# Altium PCB F4_Fc_Board.PcbDoc
Units mil, origin at the board's own origin, x right, y up, seen from the top; angles counter-clockwise.
Board outline 2370 x 1560 mil, 2 copper layers (Top Layer, Bottom Layer); 87 components, 57 nets, 262 pads, 165 vias.
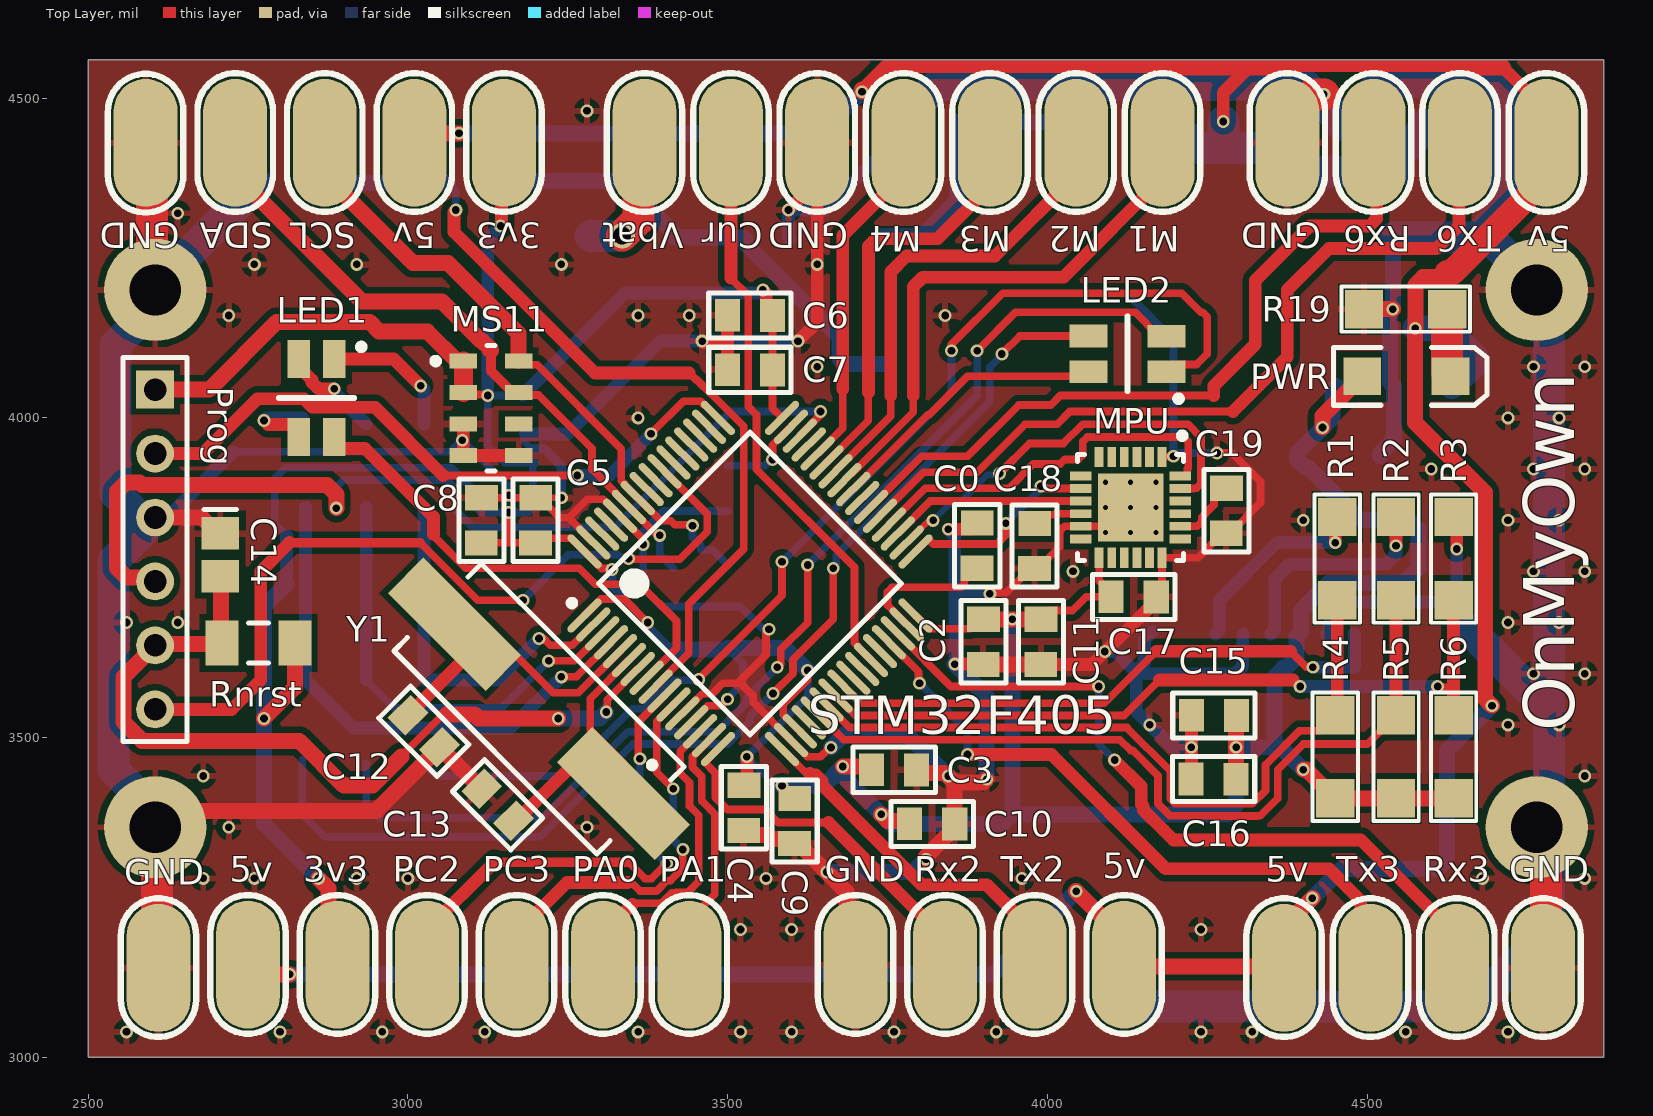
[diagram p0: Top Layer view]
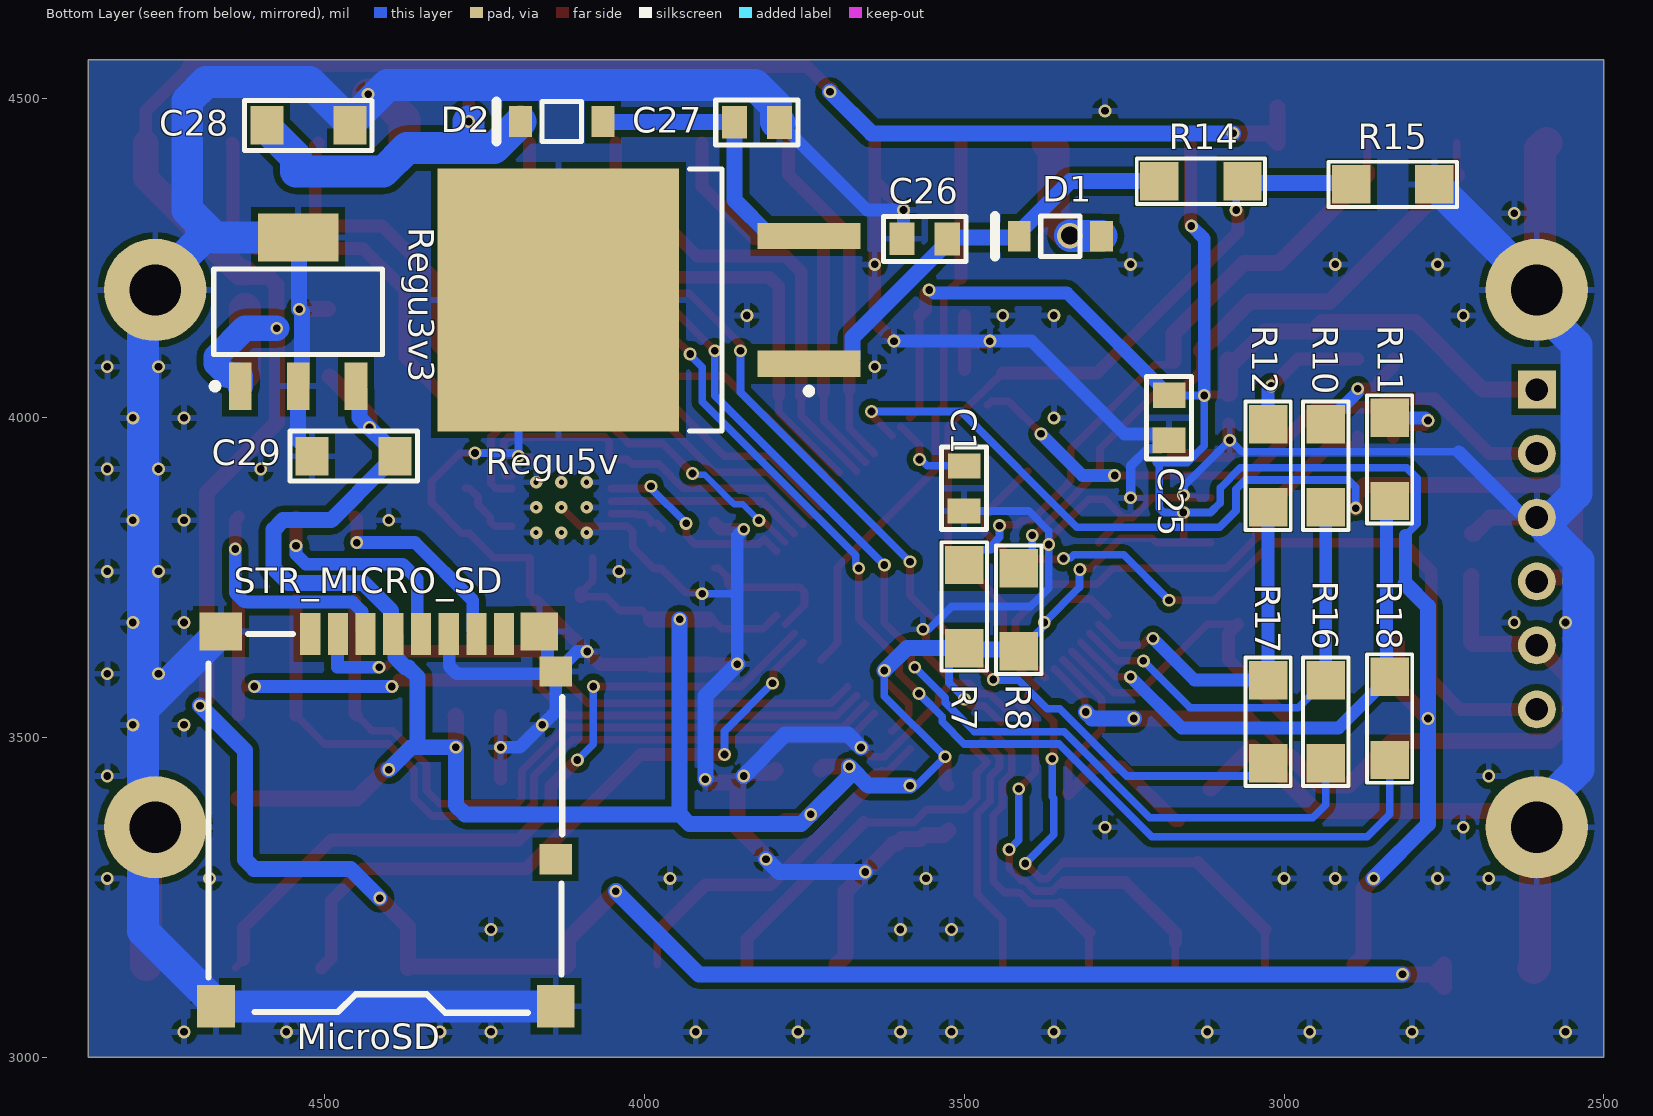
[diagram p1: Bottom Layer view, seen from below]
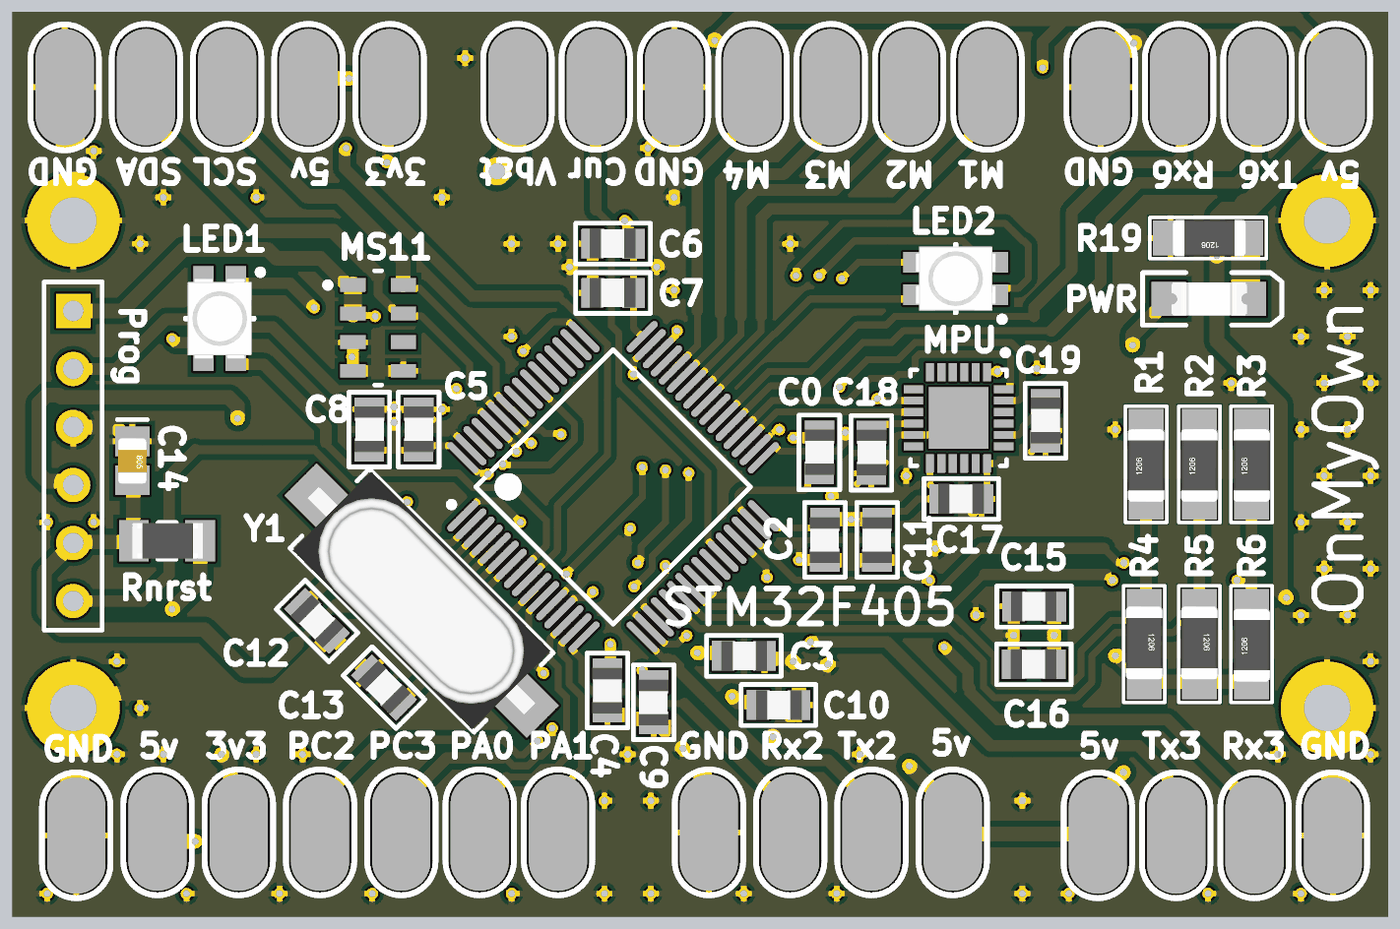
[diagram p2: 3D render of the assembled board from above, using the file's embedded part models]
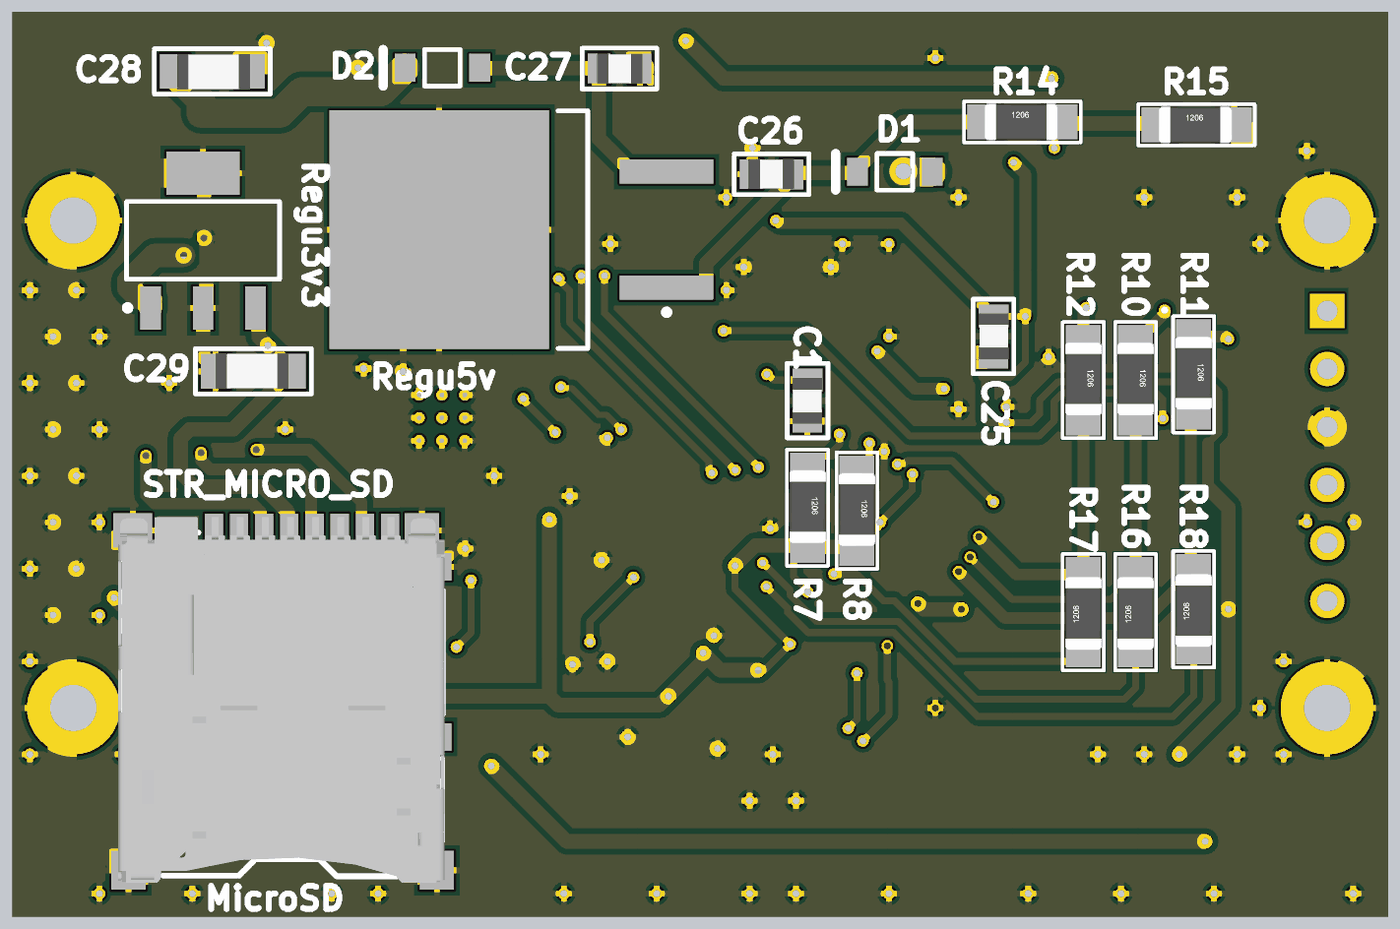
[diagram p3: 3D render of the assembled board from below, using the file's embedded part models]

## Layer stack, top to bottom
Top Solder: solder mask 0.4, Solder Resist, Dk 3.5
Top Layer: signal copper 1.4
Dielectric 1: dielectric 12.6, FR-4, Dk 4.8
Bottom Layer: signal copper 1.4
Bottom Solder: solder mask 0.4, Solder Resist, Dk 3.5

## Board outline
2500,3000 2500,4560 4870,4560 4870,3000

## Design rules (kind name [scope] priority, off if disabled: settings)
Clearance Clearance_1 [InNamedPolygon('GND_TOP') Or InNamedPolygon('GND_BOT')] p1: gap=10 ignorepadtopadclearanceinfootprint=FALSE except(0: Arc-Hole Track-Hole SMDPad-Hole THPad-Hole Via-Hole Fill-Hole Poly-Hole Region-Hole Text-Hole)
Clearance [All] p2: gap=6 ignorepadtopadclearanceinfootprint=FALSE except(0: Arc-Hole Track-Hole SMDPad-Hole THPad-Hole Via-Hole Text-Hole; 5: SMDPad-SMDPad SMDPad-THPad THPad-THPad)
PolygonConnect [All] p1: connectstyle=Relief reliefconductorwidth=10 reliefentries=4 polygonreliefangle="90 Angle" airgapwidth=10
RoomDefinition F4_Flight_Controller_1.01 [InComponentClass('F4_Flight_Controller_1.01')] p1: selectionmemoryflags=1 confinementstyle=ConfineIn formatcopy=TRUE lockcomponents=FALSE outline 0,0 12435,0 12435,225 0,225
RoutingVias [All] p1: holewidth=12 width=20 viastyle="Through Hole" minholewidth=12 minwidth=20 maxholewidth=30 maxwidth=50
SolderMaskExpansion [All] p1: expansion=4 istentingtop=FALSE
Width [All] p1: maxlimit=50 minlimit=5 preferedwidth=8 minimp=50.000000 maximp=50.000000 favimp=50.000000
30 further rules are at their usual default settings.

## Components (designator, comment, footprint, x,y, rotation, side; value= is the part's Value field where it differs from the comment)
3v3 "Pad_CMS" PAD_CMS_5.08x2.54 3150,4430 r90 top
3v3 "Pad_CMS" PAD_CMS_5.08x2.54 2890,3145 r90 top
5v "Pad_CMS" PAD_CMS_5.08x2.54 2750,3145 r90 top
5v "Pad_CMS" PAD_CMS_5.08x2.54 3010,4430 r90 top
5v "Pad_CMS" PAD_CMS_5.08x2.54 4780,4430 r90 top
5v "Pad_CMS" PAD_CMS_5.08x2.54 4120,3145 r90 top
5v "Pad_CMS" PAD_CMS_5.08x2.54 4370,3140 r90 top
C0 "CMS_0805" CONDENSATEUR_CMS_0805 3890,3765 r90 top value=2.2µF
C1 "CMS_0805" CONDENSATEUR_CMS_0805 3500,3925 r270 bottom value=2.2µF
C2 "CMS_0805" CONDENSATEUR_CMS_0805 3900,3685 r270 top value=100nF
C3 "CMS_0805" CONDENSATEUR_CMS_0805 3725,3450 r0 top value=100nF
C4 "CMS_0805" CONDENSATEUR_CMS_0805 3525.39,3425.47 r270 top value=100nF
C5 "CMS_0805" CONDENSATEUR_CMS_0805 3199.61,3804.53 r90 top value=100nF
C6 "CMS_0805" CONDENSATEUR_CMS_0805 3570,4160 r180 top value=100nF
C7 "CMS_0805" CONDENSATEUR_CMS_0805 3570,4075 r180 top value=1nF
C8 "CMS_0805" CONDENSATEUR_CMS_0805 3114.61,3804.53 r90 top value=1nF
C9 "CMS_0805" CONDENSATEUR_CMS_0805 3605,3405 r270 top value=1nF
C10 "CMS_0805" CONDENSATEUR_CMS_0805 3784.53,3365.39 r0 top value=1nF
C11 "CMS_0805" CONDENSATEUR_CMS_0805 3990,3685 r270 top value=1nF
C12 "CMS_0805" CONDENSATEUR_CMS_0805 3000,3535 r315 top value=17pF
C13 "CMS_0805" CONDENSATEUR_CMS_0805 3165,3370 r135 top value=17pF
C14 "100nF" C0805_N 2706.6,3786.04 r270 top
C15 "CMS_0805" CONDENSATEUR_CMS_0805 4295.47,3534.61 r180 top value=10µF
C16 "CMS_0805" CONDENSATEUR_CMS_0805 4295,3435 r180 top value=100nF
C17 "CMS_0805" CONDENSATEUR_CMS_0805 4170,3720 r180 top value=100nF
C18 "CMS_0805" CONDENSATEUR_CMS_0805 3979.61,3764.53 r90 top value=100nF
C19 "CMS_0805" CONDENSATEUR_CMS_0805 4279.61,3819.53 r90 top value=2.2nF
C25 "CMS_0805" CONDENSATEUR_CMS_0805 3180,3965 r90 bottom value=100nF
C26 "CMS_0805" CONDENSATEUR_CMS_0805 3526.78,4279.65 r0 bottom value=330nF
C27 "CMS_0805" CONDENSATEUR_CMS_0805 3859.53,4462.18 r180 bottom value=100nF
C28 "CMS_1206" CONDENSATEUR_CMS_1206 4460.47,4457.25 r0 bottom value=10µF
C29 "CMS_1206" CONDENSATEUR_CMS_1206 4520,3940 r180 bottom value=4.7µF
Cur "Pad_CMS" PAD_CMS_5.08x2.54 3505,4430 r90 top
D1 "MBR0520LT1G" ONSC-SOD-123-2-425-04_V 3349.79,4284.08 r0 bottom
D2 "MBR0520LT1G" ONSC-SOD-123-2-425-04_V 4129.36,4463.36 r0 bottom
GND "Pad_CMS" PAD_CMS_5.08x2.54 2610,3140 r90 top
GND "Pad_CMS" PAD_CMS_5.08x2.54 2590,4430 r270 top
GND "Pad_CMS" PAD_CMS_5.08x2.54 4375,4430 r90 top
GND "Pad_CMS" PAD_CMS_5.08x2.54 3700,3145 r90 top
GND "Pad_CMS" PAD_CMS_5.08x2.54 4775,3140 r90 top
GND "Pad_CMS" PAD_CMS_5.08x2.54 3640,4430 r90 top
LED1 "150141M173100" 3528_A 2857.15,4031.02 r270 top
LED2 "150141M173100" 3528_A 4125,4100 r180 top
M1 "Pad_CMS" PAD_CMS_5.08x2.54 4180,4430 r90 top
M2 "Pad_CMS" PAD_CMS_5.08x2.54 4045,4430 r90 top
M3 "Pad_CMS" PAD_CMS_5.08x2.54 3910,4430 r90 top
M4 "Pad_CMS" PAD_CMS_5.08x2.54 3775,4430 r90 top
MPU "MPU-6000" INSE-QFN-24_V 4130,3860 r270 top
MS11 "MS561101BA03-50" MSI-MS561101BA03-50-8_V 3130,4015 r0 top
PA0 "Pad_CMS" PAD_CMS_5.08x2.54 3305,3145 r90 top
PA1 "Pad_CMS" PAD_CMS_5.08x2.54 3440,3145 r90 top
PC2 "Pad_CMS" PAD_CMS_5.08x2.54 3030,3145 r90 top
PC3 "Pad_CMS" PAD_CMS_5.08x2.54 3170,3145 r90 top
Prog "ProgSWD" HDR1X6 2604.72,4044.23 r270 top
PWR "LED" LED_1206 4561.1,4065 r0 top
R1 "RESISTANCE_CMS_1206" RESISTANCE_CMS_1206 4453.2,3715 r90 top value=22K
R2 "RESISTANCE_CMS_1206" RESISTANCE_CMS_1206 4545,3715 r90 top value=22K
R3 "RESISTANCE_CMS_1206" RESISTANCE_CMS_1206 4635,3715 r90 top value=22K
R4 "RESISTANCE_CMS_1206" RESISTANCE_CMS_1206 4450,3535 r270 top value=47K
R5 "RESISTANCE_CMS_1206" RESISTANCE_CMS_1206 4545,3535 r270 top value=47K
R6 "RESISTANCE_CMS_1206" RESISTANCE_CMS_1206 4635,3405 r90 top value=47K
R7 "RESISTANCE_CMS_1206" RESISTANCE_CMS_1206 3500,3770 r270 bottom value=4.7K
R8 "RESISTANCE_CMS_1206" RESISTANCE_CMS_1206 3415,3765 r270 bottom value=4.7K
R10 "RESISTANCE_CMS_1206" RESISTANCE_CMS_1206 2935,3990 r270 bottom value=150
R11 "RESISTANCE_CMS_1206" RESISTANCE_CMS_1206 2835,4000 r270 bottom value=47
R12 "RESISTANCE_CMS_1206" RESISTANCE_CMS_1206 3025,3990 r270 bottom value=330
R14 "RESISTANCE_CMS_1206" RESISTANCE_CMS_1206 3195,4370 r180 bottom value=10K
R15 "RESISTANCE_CMS_1206" RESISTANCE_CMS_1206 2895,4365 r180 bottom value=2K
R16 "RESISTANCE_CMS_1206" RESISTANCE_CMS_1206 2935,3460 r90 bottom value=150
R17 "RESISTANCE_CMS_1206" RESISTANCE_CMS_1206 3025,3460 r90 bottom value=330
R18 "RESISTANCE_CMS_1206" RESISTANCE_CMS_1206 2835,3465 r90 bottom value=47
R19 "RESISTANCE_CMS_1206" RESISTANCE_CMS_1206 4625,4170 r180 top value=150
Regu3v3 "MCP1826S-3302E/DB" SOT-223-DB3_L 4541.65,4165.7 r90 bottom
Regu5v "L7805ABD2T-TR" TO-263_M 3992.99,4184.34 r0 bottom
Rnrst "100k" R1206_N 2766.39,3647.95 r0 top
Rx2 "Pad_CMS" PAD_CMS_5.08x2.54 3840,3145 r90 top
Rx3 "Pad_CMS" PAD_CMS_5.08x2.54 4640,3140 r90 top
Rx6 "Pad_CMS" PAD_CMS_5.08x2.54 4510,4430 r90 top
SCL "Pad_CMS" PAD_CMS_5.08x2.54 2870,4430 r90 top
SDA "Pad_CMS" PAD_CMS_5.08x2.54 2730,4430 r90 top
STM32F405 "STM32F405RGT6" STM-LQFP64_N 3534.89,3741.1 r45 top
STR_MICRO_SD "MOLEX_MICRO_SD_HEADER_5027740891" MOLEX_MICRO_SD_HEADER_5027740891 4522.76,3662 r0 bottom
Tx2 "Pad_CMS" PAD_CMS_5.08x2.54 3980,3145 r90 top
Tx3 "Pad_CMS" PAD_CMS_5.08x2.54 4505,3140 r90 top
Tx6 "Pad_CMS" PAD_CMS_5.08x2.54 4645,4430 r90 top
Vbat "Pad_CMS" PAD_CMS_5.08x2.54 3370,4430 r90 top
Y1 "8 MHz" HC49/4H_SMX 3205,3545 r135 top

## Footprints (in the part's own frame and the unit in brackets; to place one, negate y for a bottom-side part, rotate by r counter-clockwise, add the part's x,y. Pads: shape width x height; smd on the part's side, far side on the other; paste and mask are expansions set on the pad)
3528_A [mm] "Chip LED, 4-Leads, Body 2.8x3.5mm (max), Pitch 1.42mm, IPC Medium Density"
  rect 1.5x0.9 smd: 1(1.55,0.707) 2(1.55,-0.71) 3(-1.55,0.707) 4(-1.55,-0.707)
  silkscreen extent -2.15,-1.5 0.03,1.9, body extent -1.75,-1.4 1.75,1.4, height 1.87
C0805_N [mm] "Chip Capacitor, Body 2.0x1.3mm, IPC Medium Density"
  rect 1.3x1.5 smd: 1(-0.85,0) 2(0.85,0)
  silkscreen extent -1.8,-0.65 -1.8,0.65, body extent -0.99,-0.63 1.01,0.63, height 0.8
CONDENSATEUR_CMS_0805 [mm] "CONDENSATEUR CMS 0805 ; DIMENSIONS : 2mm x 1.25mm"
  rect 1x1.3 smd: 1(0,0) 2(1.79,-0.01)
  silkscreen extent -0.74,-0.9 2.53,0.89, body extent -0.09,-0.67 1.91,0.64, height 0.73
CONDENSATEUR_CMS_1206 [mil] "CONDENSATEUR CMS 1206 ; DIMENSIONS : 3.2mm x 1.6mm"
  rect 51.18x60 smd: 1(0,0) 2(130,0)
  silkscreen extent -35,-39 165,39, body extent 0,-30 126,31, height 64
HC49/4H_SMX [mm] "Quartz Crystal, SM; Body 13.4 (inc. leads) x 4.9 mm (LxW max)"
  rect 5.5x2 smd: 1(-4.75,0) 2(4.75,0)
  silkscreen extent -5.7,-2.45 5.7,2.45, body extent -6.7,-2.45 6.7,2.45, height 5.08
HDR1X6 [mm]
  rect 1.5x1.5 hole 0.9: 1(0,0)
  round 1.5 hole 0.9: 2(2.54,0) 3(5.08,0) 4(7.62,0) 5(10.16,0) 6(12.7,0)
  silkscreen extent -1.27,-1.27 13.97,1.27
INSE-QFN-24_V [mm] "QFN, 24-Leads, Body 4.00x4.00mm, Pitch 0.50mm, Thermal Pad 2.7x2.6mm"
  rect 0.8x0.35 smd: 1(-2,1.25) 2(-2,0.75) 3(-2,0.25) 4(-2,-0.25) 5(-2,-0.75) 6(-2,-1.25) 13(2,-1.25) 14(2,-0.75) 15(2,-0.25) 16(2,0.25) 17(2,0.75) 18(2,1.25)
  rect 0.35x0.85 smd: 7(-1.25,-1.975) 8(-0.75,-1.975) 9(-0.25,-1.975) 10(0.25,-1.975) 11(0.75,-1.975) 12(1.25,-1.975) 19(1.25,1.975) 20(0.75,1.975) 21(0.25,1.975) 22(-0.25,1.975) 23(-0.75,1.975) 24(-1.25,1.975)
  rect 2.7x2.6 smd: 25(0,0)
  silkscreen extent -2.97,-2.1 2.1,2.18, body extent -2,-2 2,2, height 0.95
LED_1206 [mm] "SM LED; 2 Flat Leads"
  rect 1.5x1.5 smd: 1(-1.75,0) 2(1.75,0)
  silkscreen extent -2.9,-1.15 3.2,1.15, body extent -1.62,-0.72 1.68,0.73, height 1.36
MOLEX_MICRO_SD_HEADER_5027740891 [mm]
  rect 1.5x1.7 smd: 0(-9.754,14.783) 0(3.74,14.783)
  rect 1.5x1.5 smd: 0(-9.1,-0.1)
  rect 1.7x1.5 smd: 0(3.55,-0.1)
  rect 0.8x1.68 smd: 1(0,0) 2(-1.1,0) 3(-2.2,0) 4(-3.3,0) 5(-4.4,0) 6(-5.5,0) 7(-6.6,0) 8(-7.7,0)
  rect 1.3x1.2 smd: 9(-9.75,1.49) 10(-9.75,8.94)
  round 1.524 on Bottom Overlay: ""(0.432,1.93)
  silkscreen extent -10.01,0 4.04,15.04, body extent -10.1,-0.68 4.2,15.32, height 1.88
MSI-MS561101BA03-50-8_V [mm] "SMD, 8-Leads, Body 5x3mm, Pitch 1.25mm"
  rect 1.1x0.6 smd: 1(-1.1,1.875) 2(-1.1,0.625) 3(-1.1,-0.625) 4(-1.1,-1.875) 5(1.1,-1.875) 6(1.1,-0.625) 7(1.1,0.625) 8(1.1,1.875)
  silkscreen extent -2.32,-2.5 0.15,2.5, body extent -1.5,-2.5 1.5,2.5, height 1
ONSC-SOD-123-2-425-04_V [mm] "SOD, 2-Leads, Body 2.69x1.6mm"
  rect 0.91x1.22 smd: 1(-1.635,0) 2(1.635,0)
  silkscreen extent -0.78,-0.8 2.59,0.8, body extent -1.35,-0.8 1.35,0.8, height 1.35
PAD_CMS_5.08x2.54 [mil] "Pad pour souder un fil"
  oval 200x100 smd paste+0.2: 1(0,0)
  silkscreen extent -108,-59 109,59, body extent -85,-30 84,30, height 10
R1206_N [mm] "Chip Resistor, Body 3.2x1.6mm, IPC Medium Density"
  rect 1.3x1.8 smd: 1(-1.45,0) 2(1.45,0)
  silkscreen extent -0.4,-0.8 0.4,0.8, body extent -1.68,-0.87 1.68,0.87, height 0.71
RESISTANCE_CMS_1206 [mil] "RESISTANCE CMS 1206 ; DIMENSIONS : 3.2mm x 1.6mm"
  rect 60x60 smd: 1(0,0) 2(130,0)
  silkscreen extent -35,-35 165,35, body extent 0,-31 126,31, height 39
SOT-223-DB3_L [mm] "SOT223, 4-Leads, Body 6.5x3.5mm, Pitch 2.3mm, Lead Span 7mm, IPC High Density"
  rect 1.9x0.9 smd: 1(-2.95,2.3) 2(-2.95,0) 3(-2.95,-2.3)
  rect 1.9x3.2 smd: 4(2.95,0)
  silkscreen extent -3.07,-3.35 1.7,3.43, body extent -1.85,-3.35 1.85,3.35, height 1.8
STM-LQFP64_N [mm] "Thin QFP, 64-Leads, Body 10x10mm, Pitch 0.5mm, IPC Medium Density"
  oval 1.8x0.3 smd: 1(-5.55,3.75) 2(-5.55,3.25) 3(-5.55,2.75) 4(-5.55,2.25) 5(-5.55,1.75) 6(-5.55,1.25) 7(-5.55,0.75) 8(-5.55,0.25) 9(-5.55,-0.25) 10(-5.55,-0.75) 11(-5.55,-1.25) 12(-5.55,-1.75) 13(-5.55,-2.25) 14(-5.55,-2.75) 15(-5.55,-3.25) 16(-5.55,-3.75) 33(5.55,-3.75) 34(5.55,-3.25) 35(5.55,-2.75) 36(5.55,-2.25) 37(5.55,-1.75) 38(5.55,-1.25) 39(5.55,-0.75) 40(5.55,-0.25) 41(5.55,0.25) 42(5.55,0.75) 43(5.55,1.25) 44(5.55,1.75) 45(5.55,2.25) 46(5.55,2.75) 47(5.55,3.25) 48(5.55,3.75)
  oval 0.3x1.8 smd: 17(-3.75,-5.55) 18(-3.25,-5.55) 19(-2.75,-5.55) 20(-2.25,-5.55) 21(-1.75,-5.55) 22(-1.25,-5.55) 23(-0.75,-5.55) 24(-0.25,-5.55) 25(0.25,-5.55) 26(0.75,-5.55) 27(1.25,-5.55) 28(1.75,-5.55) 29(2.25,-5.55) 30(2.75,-5.55) 31(3.25,-5.55) 32(3.75,-5.55) 49(3.75,5.55) 50(3.25,5.55) 51(2.75,5.55) 52(2.25,5.55) 53(1.75,5.55) 54(1.25,5.55) 55(0.75,5.55) 56(0.25,5.55) 57(-0.25,5.55) 58(-0.75,5.55) 59(-1.25,5.55) 60(-1.75,5.55) 61(-2.25,5.55) 62(-2.75,5.55) 63(-3.25,5.55) 64(-3.75,5.55)
  silkscreen extent -5.67,-4.25 4.25,4.57, body extent -5,-5 5,5, height 1.6
TO-263_M [mm] "D2-PAK, 4-Leads, Body 9.2x10.2mm, Pitch 2.54mm, Lead Span 15.4mm, IPC Low Density"
  rect 4.1x1.05 smd: 1(-6.35,2.54) 3(-6.35,-2.54)
  rect 9.6x10.45 smd: 4(3.6,0)
  silkscreen extent -6.47,-5.2 -1.6,5.2, body extent -2.9,-5.2 6.45,5.2, height 4.6

## Part data
3v3 3v3 5v 5v 5v 5v 5v Cur GND GND GND GND GND GND M1 M2 M3 M4 PA0 PA1 PC2 PC3 Rx2 Rx3 Rx6 SCL SDA Tx2 Tx3 Tx6 Vbat: "Pad pour souder un fil", LatestRevisionNote="Mech Layer 1 removed.", PackageReference=PAD_CMS, Publisher="Damien Guitton"
C0 C1 C2 C3 C4 C5 C6 C7 C8 C9 C10 C11 C12 C13 C15 C16 C17 C18 C19 C25 C26 C27: library part CONDENSATEUR_CMS_CER_0805, "CONDENSATEUR CMS CERAMIQUE 0805", Type=CMS_0805
C14: library part Condensateur, "Capacitor", LatestRevisionDate=17-Jul-2002, LatestRevisionNote="Re-released for DXP Platform.", PackageReference=RAD-0.3, Published=8-Jun-2000, Publisher="Altium Limited"
C28 C29: library part CONDENSATEUR_CMS_CER_1206, "CONDENSATEUR CMS CERAMIQUE 1206", Type=CMS_1206
D1 D2: library part CMP-004-00003-1, "Schottky Power Rectifier, 20 V, 5.5 A, -65 to 125 degC, 2-Pin SMD, RoHS, Tape and Reel", Case/Package=SOD, Forward Current=5dA, Forward Voltage=3.85dV, Manufacturer="ON Semiconductor", Max Operating Temperature=125°C, Max Surge Current=5.5A, Min Operating Temperature=-65°C, Package Description="2-Pin Surface Mount Device, Body 2.69 x 1.6 mm", Package Quantity=3000, Package Reference=SOD-123-2-425-04, Peak Reverse Current=250uA, Datasheet URL=http://www.onsemi.cn/pub_link/Collateral/MBR0520LT1-D.PDF, Datasheet Version="Rev. 6, 01/2012", Elements=1, Manufacturer URL=http://www.onsemi.com/, Mounting Technology=SM, Packaging=TapeandReel, Pins=2, RoHS Compliant=True
LED1 LED2: library part CMP-1431-00001-1, "SMD Full-Color Top LED, WL-SFTW, Red & Green & Blue", Color="Red & Green & Blue", Manufacturer="Wuerth Elektronik", ComponentLink1Description="Manufacturer URL", ComponentLink1URL=http://www.we-online.com, ComponentLink2Description=Datasheet, ComponentLink2URL=http://katalog.we-online.com/led/datasheet/150141M173100.pdf, PackageReference=3528_A, PartNumber=150141M173100
MPU: library part CMP-2000-05008-1, "3-Axis Gyroscope 3-Axis Accelerometer Motion Processing Unit with I2C and SPI, 2.5, 3 or 3.3 V, -40 to 85 degC, 24-Pin QFN, RoHS, Tape and Reel", Manufacturer=InvenSense, Operating Temperature=-40degC~85degC(TA), Package Description="24-Pin Quad Flat No-lead Package, Body 4 x 4 mm, Pitch 0.5 mm", Package Reference=QFN-24, Standard Package=5,000, Category=Sensors,Transducers, Datasheet URL=https://www.invensense.com/wp-content/uploads/2015/02/MPU-6000-Datasheet1.pdf, Datasheet Version="Rev. 3.4, 08/2013", Family=Multifunction, Featured Product=MPU60006AxisIntegratedSPISolution, Manufacturer URL=http://www.invensense.com/, Online Catalog=MPU-6000™Series, Other Names="1428-1005-2 / MPU6000", Output Type=I²C,SPI, Sensor Type=Accelerometer,Gyroscope,3Axis
MS11: library part CMP-2000-05251-1, "Barometric Pressure Sensor, with Stainless Steel Cap, 1.8 to 3.6 V, -45 to 85 degC, 8-Pin QFN, RoHS, Tape and Reel", Manufacturer="Measurement Specialties", Operating Pressure Max=1200mbar, Operating Pressure Min=10mbar, Operating Temperature Max=85degC, Operating Temperature Min=-40degC, Package Description="8-Pin Surface Mount Device, Body 5 x 3 mm, Pitch 1.25 mm", Package Reference=MS561101BA03-50-8, Sensor Case Style=QFN, Supply Current=12.5µA, Supply Voltage Max=3.6V, Supply Voltage Min=1.8V, Connection Size=0.5mm, Datasheet URL=http://www.te.com/commerce/DocumentDelivery/DDEController?Action=srchrtrv&DocNm=MS5611-01BA03&DocType=Data+Sheet&DocLang=English&DocFormat=pdf&PartCntxt=CAT-BLPS0036, Datasheet Version=Sep-15, Manufacturer URL=http://www.meas-spec.com/, No. of Pins=8, Pressure Type=Barometric, SVHC=NoSVHC(20-Jun-2013)
Prog: library part "Header 6", "Header, 6-Pin", LatestRevisionDate=17-Jul-2002, LatestRevisionNote="Re-released for DXP Platform.", Publisher="Altium Limited"
PWR: "Typical LED", LatestRevisionDate=08-Jul-2005, LatestRevisionNote="Mech Layer 1 removed.", PackageReference=LED-1, Published=8-Jun-2000, Publisher="Altium Limited"
R1 R2 R3 R4 R5 R6 R7 R8 R10 R11 R12 R14 R15 R16 R17 R18 R19: "RESISTANCE CMS 1206", Type=CMS_1206
Regu3v3: library part CMP-0136-00504-1, "1000 mA, Low Voltage, Low Quiescent Current LDO Regulator, 3-Pin SOT-223, Extended Temperature", DatasheetVersion="revA, Aug-2007", PackageDescription="3-Lead Plastic Small Outline Transistor (DB) [SOT-223]", PackageReference=SOT-223-DB3, PackageVersion="revBB, Aug-2009"
Regu5v: library part CMP-0244-00199-1, "Positive Voltage Regulator, 3-Pin D2PAK, Tape and Reel", ComponentLink1Description="Manufacturer URL", ComponentLink1URL=http://www.st.com, ComponentLink2Description=Datasheet, ComponentLink2URL=http://www.st.com/internet/com/TECHNICAL_RESOURCES/TECHNICAL_LITERATURE/DATASHEET/CD00000444.pdf, DatasheetVersion=16/11/2011, PackageDescription="3-Pin Transistor Outline Package 2.54 mm Pitch, 15.4 mm Lead Span (D2PAK)", PackageReference=TO-263, PackageVersion=2011
Rnrst: library part Resistor, "Resistor", LatestRevisionDate=17-Jul-2002, LatestRevisionNote="Re-released for DXP Platform.", PackageReference=AXIAL-0.5, Published=8-Jun-2000, Publisher="Altium Limited"
STM32F405: "ARM Cortex-M4 32-bit MCU+FPU, 210 DMIPS, 1024 kB Flash, 192 kB Internal RAM, 51 I/Os, 64-pin LQFP, -40 to 85 degC, Tray", I/Os (High Current)=51, Manufacturer=STMicroelectronics, Operating Frequency(F) (Processor speed) (MHz)=168, Supplier Part Number 1=497-11767-ND, Supply Voltage(Vcc) max (V)=3.6, Supply Voltage(Vcc) min (V)=1.8, ComponentLink1Description="Manufacturer URL", ComponentLink1URL=http://www.st.com/web/en/home.html, ComponentLink2Description=Datasheet, ComponentLink2URL=http://www.st.com/st-web-ui/static/active/en/resource/technical/document/datasheet/DM00037051.pdf, ComponentLink3Description="Package Specification", ComponentLink3URL=http://www.st.com/st-web-ui/static/active/en/resource/technical/document/datasheet/DM00037051.pdf, Core="ARM Cortex-M4", D/A Converter=2x12-bit, DatasheetVersion="Rev. 4", FLASH Size (Prog) (kB)=1024, Internal RAM Size (kB)=192, Mounting Technology="Surface Mount", PackageDescription="64-Pin Low Profile Quad Flat Package, 10 x 10 mm Body, 0.5 mm Pitch", PackageReference=LQFP64, PackageVersion="Rev. 4, 06/2013", Packing=Tray, PartNumber=STM32F405RGT6, Supplier 1=Digi-Key, Supplier 2=Farnell, Supplier 3=Newark, Supplier 4=Mouser, Supplier Part Number 2=2064363, Supplier Part Number 3=73T2329, Supplier Part Number 4=511-STM32F405RGT6
Y1: library part Quartz, "Crystal Oscillator", LatestRevisionDate=17-Jul-2002, LatestRevisionNote="Re-released for DXP Platform.", PackageReference=R38, Published=8-Jun-2000, Publisher="Altium Limited"

## Free pads (board coordinates)
  round 160 hole 80: 2(4765,4200) 3(4765,3360) 4(2605,4200) 5(2605,3360)

## Via types
v1: diameter 20, hole 12, Top Layer to Bottom Layer, 155 vias
v2: diameter 19.68, hole 7.87, Top Layer to Bottom Layer, 9 vias
v3: diameter 40, hole 28, Top Layer to Bottom Layer, 1 vias

## Nets (pads, with @x,y where several pads share a name; then routed paths per layer and width w, separated by ;. In a path a pad name is that pad's centre, name@x,y a point inside that pad or via, vN(x,y) a via of type N, cw(c..) or ccw(c..) an arc to the next point about the centre after c; other vN are vias at no path point)
3V3: 3v3.1 C2.1 C3.1 C4.1 C5.1 C6.1 C7.1 C8.1 C9.1 C10.1 C11.1 C15.1 C16.1 C17.2 C25.2 C29.2 MPU.13 MS11.1 MS11.2 Prog.1 PWR.1 R4.2 R5.2 R6.1 R7.2 R8.2 Regu3v3.3 Rnrst.2 STM32F405.1 STM32F405.13 STM32F405.19 STM32F405.32 STM32F405.48 STM32F405.64 STR_MICRO_SD.4 | length 7938.1
  Top Layer w12: MS11.1@3076.85,4088.82 MS11.1 ; MS11.2 3089.77,4036.53 3123.47,4036.53 v1(3125,4035) ; C8.1 3157.11,3804.53 ; v1(3145,4300) v1@3146.53,4301.53 ; 3v3.1@3146.53,4426.53 3v3.1@3150,4430 ; v1(3157.5,3852) 3157.11,3851.61 3157.11,3804.53 ; STM32F405.1 3276.12,3690.99 3301.99,3716.85 3338.15,3716.85 v1(3375,3680) ; v1(3319.34,3763) 3317.81,3764.53 3302.8,3764.53 3276.12,3791.21 STM32F405.64 3255.24,3811.95 3207.03,3811.95 C5.1 3157.11,3804.53 ; STM32F405.13 3443.16,3523.96 3469.02,3549.82 3489.82,3549.82 v1(3499.91,3559.91) ; C6.1 C7.1 3570,4015 STM32F405.48 ; STM32F405.19@3612.97,3510.04 STM32F405.19 3612.84,3510.17 3586.97,3536.04 3586.97,3552.67 3625,3590.69 v1(3625,3605) ; STM32F405.32 3814.54,3670.24 3879.34,3670.24 3894.09,3685 C2.1 ; C11.1 4003.69,3698.69 4038.69,3698.69 4060.39,3720.39 C17.2 ; MPU.13 4080.79,3745.04 C17.2@4099.53,3726.3
  Top Layer w20: v1@3146.53,4301.53 3v3.1@3146.53,4426.53 ; C4.1 3530,3430.08 v1(3530,3470) ; v1(3555,4200) 3560.31,4194.69 3560.31,4169.69 C6.1 ; C17.2 C17.2@4099.53,3726.3
  Top Layer w25: Prog.1 2689.23,4044.23 2795,4150 2940,4150 2955,4135 3030.67,4135 MS11.1@3076.85,4088.82 ; v1(2775,3530) 2823.48,3578.48 Rnrst.2 ; v1(2860,3280) 2875.65,3264.35 2875.65,3159.35 3v3.1@2890,3145 ; v1(3680,3455) 3720,3455 C3.1 ; v1(3740,3380) 3750,3370 3779.92,3370 C10.1 ; C2.1 v1(3945,3685) C11.1 ; C16.1 v1(4295,3485) 4295,3534.13 C15.1 ; v1(4400,3450) 4405,3450 R4.2 R5.2 R6.1 ; v1(4430,3985) 4430,4002.8 PWR.1
  Top Layer w30: MS11.2 MS11.1
  Bottom Layer w10: v1@3547.77,4195.47 3552.29,4200 v1(3555,4200)
  Bottom Layer w12: 2810,3816.62 2792,3834.62 2792,3905.38 2808.62,3922 3068.25,3922 3100,3890.25 3100,3867.03 3115.03,3852 v1(3157.5,3852) 3187.97,3852 3195,3859.03 3195,3925 3200,3930 3151.34,3930 3125,3956.34 v1(3125,4035) 3179.13,4035 C25.2 ; v1(3319.34,3763) 3320,3762.34 3320,3735 v1(3375,3680) 3376.53,3678.47 3376.53,3673.47 R8.2 ; v1(3499.91,3559.91) 3499.91,3561.91 3524,3586 3524,3616 R7.2 ; v1(3585,3425) 3575,3425 v1(3530,3470) 3625,3565 v1(3625,3605)
  Bottom Layer w20: 2810,3740 2810,3816.62 ; v1(3125,4035) 3125,4280 v1(3145,4300) ; C25.2 3339.61,4195.47 v1@3547.77,4195.47
  Bottom Layer w25: 2810,3740 2775,3705 v1(2775,3530) 2775,3365 v1(2860,3280) ; R8.2 3417.5,3637.5 3497.5,3637.5 R7.2 3590,3640 v1(3625,3605) ; v1(3585,3425) 3650,3425 v1(3680,3455) 3680,3440 v1(3740,3380) 3755,3365 3930,3365 3945,3380 ; v1(3945,3685) 3945,3380 ; v1(4400,3450) 4365,3485 4350,3485 ; Regu3v3.3 4445.88,4044.34 4445.88,4000.29 4390,3944.41 C29.2 4390,3935.59 4403.09,3922.5 4407.5,3922.5 4490,3840 4565.36,3840 4580,3825.36 4580,3765 4556.57,3741.57 4439.32,3741.57 4396.08,3698.34 4396.08,3665.25 4389.59,3658.75 4389.59,3626.31 4384.78,3621.49 4384.78,3620.85 4373.35,3609.43 4369.43,3609.43 4355,3595 4355,3490 4350,3485 ; 3945,3380 4280.36,3380 4295,3394.64 v1(4295,3485) 4350,3485
5Vin: C27.1 D2.1 Regu5v.3 | length 467.2
  Bottom Layer w25: Regu5v.3 3803.03,4284.34 3859.53,4340.84 C27.1 3860.12,4462.77 4064.4,4462.77 D2.1
+5: 5v.1 C28.2 D2.2 Regu3v3.1 | length 6232.2
  Top Layer w20: v1@3710,4513.29 3746.21,4549.5 4208.79,4549.5 4210.36,4547.93 ; v1(4275,4463.36) 4275,4508.28 4314.65,4547.93 ; 4347.14,4550.43 4672.86,4550.43 ; 4712.07,4547.93 4780,4480 5v.1@4780,4430
  Top Layer w25: 5v.1@2764.35,3130.65 2750,3145 2750,3110 2770,3130 v1(2815,3130) ; 5v.1@3010,4485 3010,4430 3025,4445 v1(3080,4445) ; v1(3710,4510) v1@3710,4513.29 ; v1(4045,3260) 4120,3185 4120,3145 4122.5,3142.5 4367.5,3142.5 4370,3140 4370,3205 v1(4414.14,3249.14) ; 4210.36,4547.93 4314.65,4547.93 4344.64,4547.93 ; 4625,4227 4618,4220 4587.42,4220 4575.5,4208.08 4575.5,4140.5 v1(4575,4140) 4575,3992.58 4684.5,3883.08 4684.5,3560.5 v1(4695,3550) ; 4675.36,4547.93 4712.07,4547.93
  Top Layer w40: 4625,4227 4632,4227 4780,4375 5v.1@4780,4430
  Bottom Layer w25: v1(2815,3130) 3915,3130 v1(4045,3260) ; v1(3080,4445) 3645,4445 v1(3710,4510) ; v1(4414.14,3249.14) 4460,3295 4610.36,3295 4625,3309.64 4625,3480 v1(4695,3550)
  Bottom Layer w40: v1(4575,4140) 4625.16,4140 4669.92,4095.25 4669.92,4084.92 4651.96,4066.96 4634.48,4066.96 4632.2,4064.68 Regu3v3.1
  Bottom Layer w50: D2.2 4235.04,4422.05 4275,4422.05 ; v1(4275,4463.36) 4275,4422.05 ; C28.2 4590.47,4452.84 4545,4407.37 4545,4385 4408.55,4385 4371.5,4422.05 4275,4422.05
ADC1_IN9: Cur.1 STM32F405.27 | length 899.4
  Top Layer w12: 3505,4218.58 3532.21,4191.37 3532.21,4017.79 3545,4005 3545,3920 3698.33,3766.67 3698.33,3648.36 3703.45,3643.24 3703.45,3642.14 STM32F405.27
  Top Layer w20: 3505,4218.58 Cur.1
ADC_IN11: R14.2 R15.1 STM32F405.9 | length 1294.8
  Top Layer w12: STM32F405.9 3408.09,3600.38 3408.09,3601.35 3439,3632.26 3439,3709 3525,3795 3525,3986.65 3474.85,4036.8 3474.46,4036.8 3451.26,4060 3450,4060 3440,4070
  Top Layer w20: v1(3075,4325) 3072.05,4322.05 3072.05,4290.5 3292.55,4070 3440,4070
  Bottom Layer w12: R14.2@3062.5,4367.5 3075,4355 v1(3075,4325)
  Bottom Layer w25: R15.1 2897.5,4367.5 R14.2@3062.5,4367.5
BLUE: R11.2 R18.2 STM32F405.4 | length 838.6
  Top Layer w12: v1(3240,3595) 3263.52,3595 STM32F405.4
  Bottom Layer w20: R11.2@2840,3860 2840,3600 R18.2 2915,3515 3160,3515 v1(3240,3595)
GND: C0.2 C1.2 C2.2 C3.2 C4.2 C5.2 C6.2 C7.2 C8.2 C9.2 C10.2 C11.2 C12.2 C13.2 C14.1 C15.2 C16.2 C17.1 C18.1 C19.1 C25.1 C26.2 C27.2 C28.1 C29.1 GND.1 MPU.1 MPU.11 MPU.18 MPU.25 MS11.3 MS11.4 MS11.5 pad.2 pad.3 pad.4 pad.5 Prog.3 R15.2 R19.2 Regu3v3.2 Regu3v3.4 Regu5v.4 STM32F405.12 STM32F405.18 STM32F405.60 STM32F405.63 STR_MICRO_SD.0 STR_MICRO_SD.6 STR_MICRO_SD.9 | length 13454.3
  Top Layer w10: C5.2 3205.91,3875 v1(3240,3875)
  Top Layer w12: C8.2 C5.2 ; C5.2@3205.91,3875 3237.28,3843.63 3251.41,3843.63 ; STM32F405.63 3251.41,3843.63 ; v1(3368,3802) 3368,3810.42 3305.67,3872.75 3280.53,3872.75 3251.41,3843.63 ; STM32F405.12 3429.24,3537.88 3459.27,3567.91 3460.24,3567.91 3461.15,3568.82 3476.29,3568.82 3492.47,3585 3520,3585 ; v1(3564.5,3669.5) 3560,3665 3560,3630 3520,3590 3520,3585 ; v1(3661.53,3484.5) 3659.36,3484.5 3645.11,3470.25 3624.92,3470.25 3599.05,3496.12 STM32F405.18 3540,3555.04 3540,3565 3520,3585 ; v1(3910,3725) 3911.53,3726.53 3935.7,3726.53 3973.7,3764.53 C18.1 3985.51,3764.53 4018.59,3797.61 4018.59,3822.03 4027.03,3830.47 MPU.11 4100.47,3830.47 v2(4130,3860) ; C17.1@4170,3714.09 4179.21,3723.31 MPU.18 ; MPU.1 4179.84,3939.37 4196.37,3939.37 v1(4197,3940) ; MPU.18@4179.42,3781.26 4235.43,3781.26 4273.7,3819.53 C19.1 4285.51,3819.53 4333.02,3867.04 4333.02,3900.64 4288.66,3945 v1(4265,3945)
  Top Layer w20: MS11.3 MS11.4 MS11.5 ; v1(3460,4120) 3462.11,4117.89 3499.53,4117.89 ; C7.2 3499.53,4117.89 ; C6.2 3499.53,4117.89 ; v1(3595,4325) GND.1@3640,4370 ; v1(3610,4120) 3640,4150 GND.1@3640,4370 ; GND.1@3640,4430 GND.1@3640,4370 ; v1(3845,3825.79) 3880.71,3825.79 C0.2 ; v1(3855,3615) 3899.13,3615 C2.2 ; C11.2 4069.53,3614.53 v1(4089.76,3634.76) 4110,3655 4110.91,3655 C17.1@4170,3714.09 ; C16.2 4225,3435.87 v1(4225,3485) C15.2
  Top Layer w25: Prog.3 2677.94,3844.23 2702.66,3819.5 C14.1 ; pad.5@2605,3385 2949.66,3385 C12.2 3050.11,3484.89 3114.89,3420.11 C13.2 ; C4.2 3532.19,3347.81 3562.46,3347.81 3568.56,3341.71 3597.42,3341.71 C9.2 3610.51,3334.53 3685.65,3259.39 3685.65,3159.35 GND.1@3700,3145 ; C3.2 3800.08,3445 3840,3445 v1(3845,3440) 3855,3430 ; v1(3810,3310) 3810,3314.09 3855,3359.09 C10.2 3855,3430 ; C2.2 C11.2 ; v1(3905,3435) 3900,3430 3855,3430 ; R19.2 v1(4540,4170) ; GND.1@4775,3140 GND.1@4779.52,3144.52 ; pad.3@4779.52,3368.85 pad.3@4784.05,3373.37
  Top Layer w50: GND.1@2590,4430 2599.57,4420.43 2599.57,4210.43 pad.4 ; pad.5@2605,3385 2607.5,3382.5 2607.5,3142.5 GND.1@2610,3140 ; GND.1@4375,4430 4375,4466.47 4414.46,4505.93 v1(4432.21,4505.93) ; GND.1@4779.52,3144.52 pad.3@4779.52,3368.85
  Bottom Layer w10: C25.1 C25.1@3193.24,3951.76
  Bottom Layer w12: 2727,3947 3066.04,3947 v1@3084.04,3965 ; v1(3085,3965) 3155.97,3894.03 3155.97,3880.53 v1(3157.5,3879) ; C1.2 3399.53,3854.53 3368,3823 v1(3368,3802) 3368,3733.62 3396.62,3705 3520,3705 3555.5,3669.5 v1(3564.5,3669.5) ; 3855,3715.39 3864.61,3725 v1(3910,3725) ; Regu5v.4 4197,4122.06 v1(4197,3940) 4199.16,3940 4204.16,3945 v1(4265,3945)
  Bottom Layer w15: C25.1@3193.24,3951.76 3213.25,3951.76 3240,3925 v1(3240,3875)
  Bottom Layer w20: Prog.3 2612.19,3851.7 2631.7,3851.7 2727,3947 ; v1@3084.04,3965 v1(3085,3965) ; C25.1@3183.65,3974.69 3249.69,3974.69 3395,4120 v1(3460,4120) v1(3610,4120) ; C26.2 3595,4282.29 v1(3595,4325) 3652.27,4325 C27.2@3773.47,4446.19 ; v1(3845,3825.79) 3855,3815.79 3855,3715.39 v1(3855,3615) ; v1(4089.76,3634.76) 4105.5,3634.76 4136.93,3603.34 4138.07,3603.34 4151.69,3616.96 4151.69,3653.14 STR_MICRO_SD.0@4164.49,3665.94 ; v1(4225,3485) 4195,3485 4138.9,3541.1 STR_MICRO_SD.9 4142.24,3600 4293.54,3600 4305.26,3611.72 4305.26,3661.04 STR_MICRO_SD.6
  Bottom Layer w25: v1(3655,3290) 3790,3290 v1(3810,3310) ; v1(3661.53,3484.5) 3682.03,3505 3780,3505 v1(3845,3440) ; v1(3855,3615) 3905,3565 v1(3905,3435) ; C29.1 4520,3944.41 4541.65,3966.06 Regu3v3.2 4535.5,4055.71 4535.5,4165.5 v1(4540,4170) 4540,4280.19 Regu3v3.4 ; STR_MICRO_SD.0@4670,3080 STR_MICRO_SD.0@4670,3083.94
  Bottom Layer w50: pad.5@2605,3385 2540,3450 2540,3777.06 2604.72,3841.78 Prog.3 2602.98,3845.96 2579.04,3845.96 2543.19,3881.81 2543.19,4114.25 2610,4181.06 pad.4 2610,4210 R15.2 ; C27.2 3793.78,4461.78 3794.37,4462.37 3794.37,4487.55 3827.18,4520.36 4401.77,4520.36 4459.88,4462.25 4459.88,4457.84 C28.1 4460.47,4461.66 4523.81,4525 4685.71,4525 4715,4495.71 4715,4325 4693.42,4303.42 ; STR_MICRO_SD.0@4138.76,3080 STR_MICRO_SD.0@4670,3080 ; Regu3v3.4 4671.84,4281.84 4693.42,4303.42 ; STR_MICRO_SD.0@4662.52,3665.94 4666.46,3665.94 4670.98,3661.41 4670.98,3657.47 4784.05,3544.41 ; STR_MICRO_SD.0@4670,3083.94 4784.05,3197.99 4784.05,3544.41 ; 4693.42,4303.42 4693.42,4278.57 4784.05,4187.94 4784.05,3544.41
  other v1: 2560,3040 2800,3040 2960,3040 3120,3040 3360,3040 3520,3040 3600,3040 3760,3040 3920,3040 4240,3040 4320,3040 4560,3040 4720,3040 3520,3200 3600,3200 4240,3200 2680,3280 2760,3280 2920,3280 3000,3280 3560,3280 3960,3280 4680,3280 4840,3280 2720,3360 3280,3360 2680,3440 4840,3440 4160,3520 4720,3520 4800,3520 4760,3600 4840,3600 2560,3680 2640,3680 4720,3680 4800,3680 4040,3760 4760,3760 4840,3760 4400,3840 4720,3840 4800,3840 4600,3920 4760,3920 4840,3920 3360,4000 4720,4000 4800,4000 3640,4080 4760,4080 4840,4080 2720,4160 3360,4160 3440,4160 3840,4160 2760,4240 2920,4240 3240,4240 3640,4240 2640,4320 3280,4480
  other v2: 4090.63,3820.63 4130,3820.63 4169.37,3820.63 4090.63,3860 4169.37,3860 4090.63,3899.37 4130,3899.37 4169.37,3899.37
GREEN: R10.2 R16.2 STM32F405.3 | length 704.7
  Top Layer w12: v1(3220,3620) 3260.68,3620 STM32F405.3
  Bottom Layer w12: R16.2 2978,3547 3147,3547 v1(3220,3620)
  Bottom Layer w20: R16.2 R10.2
I2C1_SCL: MS11.8 R7.1 SCL.1 STM32F405.58 | length 1002.3
  Top Layer w12: SCL.1@2870,4385 SCL.1 ; MS11.8@3173.31,4090 3180.3,4083.01 3201.99,4083.01 3333.64,3951.36 3333.64,3901.69 3338.76,3896.57 3338.76,3895.47 STM32F405.58 3359.64,3874.73 3395.13,3839.24 3411.13,3839.24 3417.3,3833.06 3443.47,3833.06 v1(3445,3831.53)
  Top Layer w25: SCL.1@2870,4385 2870,4380 3008.05,4241.95 3063.05,4241.95 3173.31,4131.69 MS11.8
  Bottom Layer w12: v1(3445,3831.53) 3445,3813.38 3458,3800.38 3458,3794.16 3458.16,3794 3476,3794 R7.1
I2C1_SDA: MS11.7 R8.1 SDA.1 STM32F405.59 | length 1046.6
  Top Layer w12: SDA.1@2730,4380 SDA.1 ; MS11.7@3163.46,4039.61 3167.38,4035.69 3204.31,4035.69 3287.98,3952.02 3287.98,3919.38 3324.84,3882.52 3324.84,3881.55 3388.62,3817.77 3392.23,3817.77 v1(3393.76,3816.24)
  Top Layer w15: 3130,4105 3130,4073.07 MS11.7@3163.46,4039.61
  Top Layer w25: SDA.1@2730,4380 2928,4182 3053,4182 3114.87,4120.13 3116.42,4120.13 3127.85,4108.71 3127.85,4107.15 3130,4105
  Bottom Layer w12: v1(3393.76,3816.24) 3393.76,3786.24 R8.1
LED_1: LED1.1 STM32F405.8 | length 785.7
  Top Layer w12: 3040,3818 3040,3815.47 3090.47,3765 3268.06,3765 3293.06,3740 3362.85,3740 3420,3682.85 3420,3640.13 STM32F405.8
  Top Layer w20: LED1.1 2885,3960 2892.72,3952.28 2932.72,3952.28 3040,3845 3040,3818
LED_2: LED2.1 STM32F405.40 | length 443.6
  Top Layer w12: STM32F405.40 3696.49,3888.64 3812.84,4005 3815,4005 3875,4065 4056.83,4065 LED2.1
NetC0_1: C0.1 STM32F405.31 | length 225.1
  Top Layer w12: STM32F405.31@3780.01,3677.07 STM32F405.31 3779.87,3677.2 3750,3707.08 3750,3727.97 3757.03,3735 3865,3735 3870,3740 3870,3745 3870.41,3745.41 3870.41,3751.31 3884.09,3765 C0.1
NetC1_1: C1.1 STM32F405.47 | length 137.2
  Top Layer w12: v1(3570,3935) 3570,3957.03 3598.92,3985.95 STM32F405.47
  Bottom Layer w12: C1.1 3557.84,3925 3567.84,3935 v1(3570,3935)
NetC18_2: C18.2 MPU.10 | length 81.5
  Top Layer w12: C18.2@3972.07,3827.07 C18.2 ; C18.2@3990.39,3835.47 3990.39,3839.49 3999.59,3848.69 4011.82,3848.69 4013.13,3850 4041.51,3850 4041.67,3850.16 MPU.10
NetC19_2: C19.2 MPU.20 | length 108.3
  Top Layer w12: MPU.20 4233.99,3830.47 4241.02,3837.5 4241.02,3844.6 4260.41,3863.99 4260.41,3876.31 4274.09,3890 C19.2
NetLED1_2: LED1.2 R11.1 | length 133.5
  Top Layer w20: v1(2775,3996) 2781.48,3989.52 2821.48,3989.52 2829.19,3981.81 LED1.2
  Bottom Layer w20: v1(2775,3996) 2779,4000 R11.1
NetLED1_3: LED1.3 R12.1 | length 214.5
  Top Layer w20: LED1.3 2977.95,4092.05 v1(3020,4050)
  Bottom Layer w20: v1(3020,4050) 3025,4045 R12.1
NetLED1_4: LED1.4 R10.1 | length 160.3
  Top Layer w20: LED1.4 2829.29,4080.24 2850.28,4059.24 2850.28,4055.48 2860.24,4045.52 v1(2885,4045.52)
  Bottom Layer w20: v1(2885,4045.52) 2885,4040 R10.1
NetLED2_2: LED2.2 R18.1 | length 1759
  Top Layer w12: v1(3570.89,3569.11) 3602,3600.22 3602,3622 3665,3685 v1(3665,3765) ; v1(3928.74,4100) 3956.69,4127.95 LED2.2
  Bottom Layer w12: R18.1 2835,3380 2870,3345 3206.87,3345 3351.87,3490 3500,3490 3534.68,3524.68 3534.68,3532.81 3570.89,3569.02 v1(3570.89,3569.11) ; v1(3665,3765) 3670,3770 3670,3785 3910,4025 3910,4079.14 3928.74,4097.89 v1(3928.74,4100)
NetLED2_3: LED2.3 R17.1 | length 1770.3
  Top Layer w12: v1(3454.74,3590.91) 3454.74,3592.26 3585,3722.53 v1(3585,3775) ; v1(3850,4105) 3849.97,4114.97 3930,4195 4210,4195 4240,4165 4242.97,4165 4250,4157.97 4250,4100 4233.55,4083.55 4197.43,4083.55 LED2.3
  Bottom Layer w12: R17.1 3045,3440 3246.06,3440 3351.06,3545 3370,3545 3415,3590 3453.83,3590 v1(3454.74,3590.91) ; v1(3585,3775) 3850,4040 v1(3850,4105)
NetLED2_4: LED2.4 R16.1 | length 1778.2
  Top Layer w12: v1(3577.4,3609.93) 3583,3615.53 3583,3638 3625,3680 v1(3625,3770) ; v1(3890,4105) 3950,4165 4137.07,4165 4174.21,4127.85 LED2.4
  Bottom Layer w12: R16.1 2935,3395 2955,3375 3210,3375 3344,3509 3484,3509 3529.94,3554.94 3529.94,3562.46 v1(3577.4,3609.93) ; v1(3625,3770) 3890,4035 v1(3890,4105)
NetPWR_2: PWR.2 R19.1 | length 107.1
  Top Layer w50: R19.1 4625,4070 PWR.2
NetR1_2: R1.2 STR_MICRO_SD.7 | length 315.2
  Top Layer w20: v1(4450,3805) 4450,3841.8 R1.2
  Bottom Layer w20: STR_MICRO_SD.7 4268.66,3667.75 4268.66,3714.85 4358.81,3805 v1(4450,3805)
NetR2_2: R2.2 STR_MICRO_SD.5 | length 352.6
  Top Layer w20: v1(4545,3800) R2.2
  Bottom Layer w20: STR_MICRO_SD.5 4355.28,3667.75 4355.28,3748.28 4378.06,3771.07 4529.35,3771.07 4545,3786.72 v1(4545,3800)
NetR3_2: R3.2 STR_MICRO_SD.3 | length 368.3
  Top Layer w20: R3.2 4640,3840 v1(4640,3795)
  Bottom Layer w20: STR_MICRO_SD.3 4441.89,3667.75 4441.89,3697.3 4456.66,3712.07 4621.62,3712.07 4622.01,3712.46 4625.75,3712.46 4640,3726.72 v1(4640,3795)
OSC_IN: C12.1 STM32F405.5 Y1.2 | length 514.3
  Top Layer w12: Y1.2 3119.96,3677.23 3227.19,3570 3266.36,3570 STM32F405.5
  Top Layer w20: C12.1 3086.73,3621.73 3086.73,3663.27 Y1.2
OSC_OUT: C13.1 STM32F405.6 Y1.1 | length 479.7
  Top Layer w12: Y1.1 3337.23,3459.96 3285,3512.19 3285,3560.81 STM32F405.6
  Top Layer w20: C13.1 3170,3370 3254.23,3454.23 3295.77,3454.23 Y1.1
PA0: PA0.1 STM32F405.14 | length 492.7
  Top Layer w12: PA0.1 PA0.1@3305,3195 ; 3351.12,3239.49 3352.79,3241.16 3396.52,3241.16 3412.73,3257.37 3418.39,3257.37 3418.97,3257.95 3437.4,3257.95 3455,3275.54 3455,3378.47 3440.24,3393.22 3440.24,3430 3426,3444.25 3426,3478.96 3456.94,3509.9 STM32F405.14
  Top Layer w20: PA0.1@3305,3195 3306.63,3195 3351.12,3239.49
PA1: PA1.1 STM32F405.15 | length 392.9
  Top Layer w12: PA1.1 3440,3215 3480,3255 3480,3380.34 3474,3386.34 3459.24,3401.09 3459.24,3439.24 3445,3453.49 3445,3470.12 3470.86,3495.98 STM32F405.15
PB12: MPU.8 STM32F405.33 | length 321.4
  Top Layer w12: STM32F405.33 3813.47,3810.89 3813.6,3810.89 3821.7,3802.79 3921.37,3802.79 3935,3816.42 v1(3935,3835) ; v1(3990,3893) 3992.16,3893 3995.64,3889.53 MPU.8
  Bottom Layer w12: v1(3935,3835) 3990,3890 v1(3990,3893)
PC2: PC2.1 STM32F405.10 | length 794.4
  Top Layer w12: PC2.1 PC2.1@3030,3200 ; 3345,3305 3370.84,3279.16 3380.78,3279.16 v1(3404.81,3303.19) ; v1(3362.72,3467) 3361.19,3468.53 3361.19,3473.81 3360,3475 3360,3524.45 STM32F405.10
  Top Layer w15: 3135,3305 3345,3305
  Top Layer w20: PC2.1@3030,3200 3135,3305
  Bottom Layer w12: v1(3362.72,3467) 3362.72,3407.78 3360,3405.06 3360,3348 v1(3404.81,3303.19)
PC3: PC3.1 STM32F405.11 | length 646.5
  Top Layer w12: PC3.1 PC3.1@3170,3180 ; 3343.74,3273.74 3349.39,3273.74 3362.97,3260.16 3388.65,3260.16 3404.86,3276.37 3410.52,3276.37 3430,3295.85 v1(3430,3325) ; v1(3415,3420) 3389.32,3445.68 3389.32,3525.8 3415.18,3551.66 STM32F405.11
  Top Layer w20: PC3.1@3170,3180 3170,3195 3248.74,3273.74 3343.74,3273.74
  Bottom Layer w12: v1(3415,3420) 3415,3340 v1(3430,3325)
PC4: STM32F405.24 STR_MICRO_SD.2 | length 904.8
  Top Layer w12: STM32F405.24 3682.57,3579.63 3708.43,3553.77 4088.77,3553.77 4170,3635 ; 4380,3635 4405,3610 v1(4415,3610)
  Top Layer w20: 4170,3635 4380,3635
  Bottom Layer w20: v1(4415,3610) 4480.2,3610 4480.2,3661.25 STR_MICRO_SD.2
PROG_NRST: C14.2 Prog.5 Rnrst.1 STM32F405.7 | length 1286.5
  Top Layer w12: 2989.7,3470.3 2989.7,3471.26 3053.44,3535 3060,3535 ; v1(3310,3540) 3311.53,3541.53 3311.53,3559.5 STM32F405.7
  Top Layer w25: C14.2 2707.95,3751.22 2707.95,3649.3 2704.74,3646.09 2606.58,3646.09 Prog.5 2555,3594.51 2555,3524.61 2584.61,3495 2830,3495 2900,3425 2944.41,3425 2989.7,3470.3 ; 3060,3536.4 3104.3,3536.4 3110.7,3530 v1(3235,3530)
  Bottom Layer w25: v1(3235,3530) 3300,3530 v1(3310,3540)
PROG_SWCLK: Prog.2 STM32F405.49 | length 994.5
  Top Layer w12: 3055.02,3909.98 v1(3264.98,3909.98) ; v1(3380,3975) 3430.87,4025.87 3457.81,4025.87 3462.93,4020.75 STM32F405.49@3463.9,4020.75
  Top Layer w20: Prog.2 2679.23,3944.23 2765,4030 2837.58,4030 2851.05,4016.53 2948.47,4016.53 3055.02,3909.98
  Bottom Layer w20: v1(3264.98,3909.98) 3315,3910 v1(3380,3975)
PROG_SWDIO: Prog.4 STM32F405.46 | length 1536.8
  Top Layer w12: STM32F405.46 3612.84,3972.29 3643.47,4002.93 3643.47,4008.47 v1(3645,4010)
  Top Layer w25: Prog.4 2598.2,3750.74 2559.64,3750.74 2545,3765.39 2545,3884.61 2559.64,3899.25 2580.36,3899.25 2584.41,3895.2 2873.36,3895.2 2888,3880.55 v1(2888,3858.9)
  Bottom Layer w12: v1(2888,3858.9) 2888,3891.38 2899.62,3903 2997.13,3903 3060.38,3903 3075.19,3888.19 3075.19,3854.81 3101,3829 3324,3829 3505,4010 v1(3645,4010)
PROG_SWO: Prog.6 STM32F405.55 | length 1280.4
  Top Layer w12: 3019.06,3805 3109.06,3715 v1(3180,3715) ; v1(3345,3780) 3346,3779 3425,3779 3468,3822 3468,3849.75 STM32F405.55
  Top Layer w15: 2815,3805 3019.06,3805
  Top Layer w20: Prog.6 2724.23,3544.23 2770,3590 2770,3760 2815,3805
  Bottom Layer w12: v1(3180,3715) 3251,3786 3328.87,3786 3333.34,3781.53 3343.47,3781.53 v1(3345,3780)
RED: R12.2 R17.2 STM32F405.2 | length 579.9
  Top Layer w12: v1(3205,3655) 3212.16,3655 3222.88,3644.28 3257.12,3644.28 STM32F405.2
  Bottom Layer w20: R12.2 R17.2 3140,3590 v1(3205,3655)
SPI1_MISO: R1.1 R4.1 STM32F405.22 | length 1147.9
  Top Layer w12: STM32F405.22 3654.73,3551.79 3690.76,3515.77 4124.23,3515.77 4191.84,3448.16 4191.84,3404.42 4199.46,3396.8 4269.54,3396.8 4269.93,3396.41 4320.07,3396.41 4341,3417.34 4341,3457.87 4394.13,3511 4426,3511 R4.1
  Top Layer w20: R4.1 4453.2,3538.2 R1.1
SPI1_MOSI: R3.1 R6.2 STM32F405.23 | length 1188.4
  Top Layer w12: STM32F405.23 3668.65,3565.71 3699.6,3534.77 4119.77,3534.77 4175,3590 ; 4383.97,3590 4393.97,3580 v1(4395,3580) ; v1(4610,3580) 4611.53,3578.47 4631.53,3578.47 4635,3575
  Top Layer w20: 4175,3590 4383.97,3590 ; R6.2 4635,3575 R3.1
  Bottom Layer w20: v1(4395,3580) v1(4610,3580)
SPI1_SCK: R2.1 R5.1 STM32F405.21 | length 1268
  Top Layer w12: STM32F405.21 3681.78,3496.77 4113.23,3496.77 4130,3480 4133.13,3480 4172.84,3440.29 4172.84,3396.55 4191.59,3377.8 4261.67,3377.8 4262.06,3377.41 4327.94,3377.41 4328.33,3377.8 4332.8,3377.8 4360,3405 4360,3450 4400,3490 4500,3490 R5.1
  Top Layer w20: R5.1 R2.1
SPI2_MISO: MPU.9 STM32F405.35 | length 307.5
  Top Layer w12: STM32F405.35 3816.91,3870 4032.46,3870 4032.62,3869.84 MPU.9
SPI2_MOSI: MPU.24 STM32F405.36 | length 604.2
  Top Layer w12: STM32F405.36 3809.07,3890 3940,3890 3977.97,3927.97 4020,3927.97 4027.03,3935 4047.97,3935 4055,3942.03 4055,3962.97 4062.03,3970 4212.97,3970 4220,3962.97 4220,3921.46 4218.49,3919.94 4218.49,3910.1 4217.8,3909.42 MPU.24@4207.96,3909.42
SPI2_SCK: MPU.23 STM32F405.34 | length 653.3
  Top Layer w10: STM32F405.34 3780.36,3805.13 3815,3839.77 v1(3821.19,3839.77)
  Top Layer w12: v1(3925,3913) 3972,3960 4025,3960 4055,3990 4220,3990 4240,3970 4240,3897.03 4232.97,3890 4228.63,3890 4228.16,3889.53 MPU.23
  Bottom Layer w10: v1(3821.19,3839.77) 3846.43,3865 3860,3865 3906.09,3911.09 3923.09,3911.09 v1(3925,3913)
TIM1_CH1: M1.1 STM32F405.41 | length 845.1
  Top Layer w12: STM32F405.41@3695.49,3914.51 3790,4009.03 3790,4035
  Top Layer w20: 3790,4035 3790,4205 3805,4220 4025,4220 4180,4375 M1.1
TIM1_CH2: M2.1 STM32F405.42 | length 750.5
  Top Layer w12: STM32F405.42 3755,4002.97 3755,4035
  Top Layer w20: 3755,4035 3755,4228.28 3779.72,4253 3918,4253 4045,4380 M2.1
TIM1_CH3: M3.1 STM32F405.43 | length 662
  Top Layer w12: STM32F405.43 3720,3995.81 3720,4040
  Top Layer w20: 3720,4040 3720,4268.28 3731.72,4280 3828.28,4280 3910,4361.72 M3.1
TIM1_CH4: M4.1 STM32F405.44 | length 541.3
  Top Layer w12: STM32F405.44 3680,3983.64 3680,4045
  Top Layer w20: 3680,4045 3680,4285 3775,4380 M4.1
UART2_RX: Rx2.1 STM32F405.16 | length 582.2
  Top Layer w12: STM32F405.16 3464.03,3461.45 3464.03,3461.32 3481.01,3444.35 3481.01,3406.2 3499.52,3387.69 3558.65,3387.69 3579.13,3367.21 3657.79,3367.21
  Top Layer w20: 3657.79,3367.21 3840,3185 Rx2.1
UART2_TX: STM32F405.17 Tx2.1 | length 567.6
  Top Layer w12: STM32F405.17 3622.78,3444.41 3628.77,3444.41 ; 3696.84,3376.82 3696.84,3376.34 3700.93,3372.25 ; Tx2.1 Tx2.1@3980,3195
  Top Layer w20: 3628.77,3444.41 3631.5,3441.69 3637.63,3441.69 3647.59,3431.73 3647.59,3426.07 3696.84,3376.82 ; 3700.93,3372.25 3803.18,3270 3905,3270 Tx2.1@3980,3195
UART3_RX: Rx3.1 STM32F405.30 | length 1192.2
  Top Layer w12: STM32F405.30 3849.1,3580 v1(4080,3580) ; Rx3.1@4627,3153 Rx3.1
  Top Layer w20: v1(4105,3465) 4146.53,3423.47 4146.53,3396 4149.84,3392.68 4149.84,3387.02 4182.06,3354.8 4196.86,3340 4490,3340 4627,3203 Rx3.1@4627,3153
  Bottom Layer w12: v1(4080,3580) 4080,3490 v1(4105,3465)
UART3_TX: STM32F405.29 Tx3.1 | length 1047.4
  Top Layer w12: STM32F405.29 3798.47,3602.79 3798.47,3586.53 v1(3800,3585)
  Top Layer w20: v1(3875,3473.77) 4006.23,3473.77 4185,3295 4440,3295 4489.69,3245.31 4489.69,3155.31 Tx3.1
  Bottom Layer w12: v1(3800,3585) 3875,3510 v1(3875,3473.77)
UART6_RX: Rx6.1 STM32F405.38 | length 1165.3
  Top Layer w12: STM32F405.38 3772.47,3909.08 3803.39,3940 3875,3940 3955,4020 4005,4020 4020,4035 4260,4035
  Top Layer w20: 4260,4035 4260,4050 4325,4115 4325,4215 4410,4300 4503.28,4300 4515,4311.72 4515,4425 Rx6.1
UART6_TX: STM32F405.37 Tx6.1 | length 1285.1
  Top Layer w12: STM32F405.37 3806.23,3915 3890,3915 3965,3990 4015,3990 4035,4010 4290,4010
  Top Layer w20: 4290,4010 4375,4095 4375,4200 4440,4265 4608.28,4265 4643.28,4300 4643.28,4428.28 Tx6.1
"V BATTERIE": D1.1 Vbat.1 | length 209.5
  Top Layer w50: v3(3335,4285) 3360.43,4310.43 3360.43,4420.43 Vbat.1
  Bottom Layer w50: D1.1 3334.08,4284.08 v3(3335,4285)
V_bat: C26.1 D1.2 R14.1 Regu5v.1 | length 692.8
  Bottom Layer w25: R14.1 3334.34,4370 3414.16,4290.18 D1.2 3416.38,4281.86 3524.56,4281.86 C26.1 3526.78,4273.75 3674.78,4125.74 3674.78,4092.51 3682.95,4084.34 Regu5v.1
pads on no net: MPU.2 MPU.3 MPU.4 MPU.5 MPU.6 MPU.7 MPU.12 MPU.14 MPU.15 MPU.16 MPU.17 MPU.19 MPU.21 MPU.22 MS11.6 STM32F405.20 STM32F405.25 STM32F405.26 STM32F405.28 STM32F405.39 STM32F405.45 STM32F405.50 STM32F405.51 STM32F405.52 STM32F405.53 STM32F405.54 STM32F405.56 STM32F405.57 STM32F405.61 STM32F405.62 STR_MICRO_SD. STR_MICRO_SD.1 STR_MICRO_SD.8 STR_MICRO_SD.10

## Polygon pours and split planes (outlines as drawn)
GND on Bottom Layer "GND_BOT" (solid, pour order 2): 2500,4560 4870,4560 4870,3000 2500,3000
GND on Top Layer "GND_TOP" (solid, pour order 0): 2500,4560 4870,4560 4870,3000 2500,3000

## Silkscreen, mask and mechanical layers (free items; w line width, h text height)
Top Overlay:
  text "OnMyOwn" at 4823.34,3510 h80 r90
Mechanical 15:
  lines w10: 2655,4545 2655,4515 2675,4515

## Text inside footprints (layer, text, board x,y; h text height)
STR_MICRO_SD: Bottom Overlay "MicroSD" at 4543.67,3012.9 h40